# EAGLE board PKE Meter v8 (EAGLE 9.7.0)
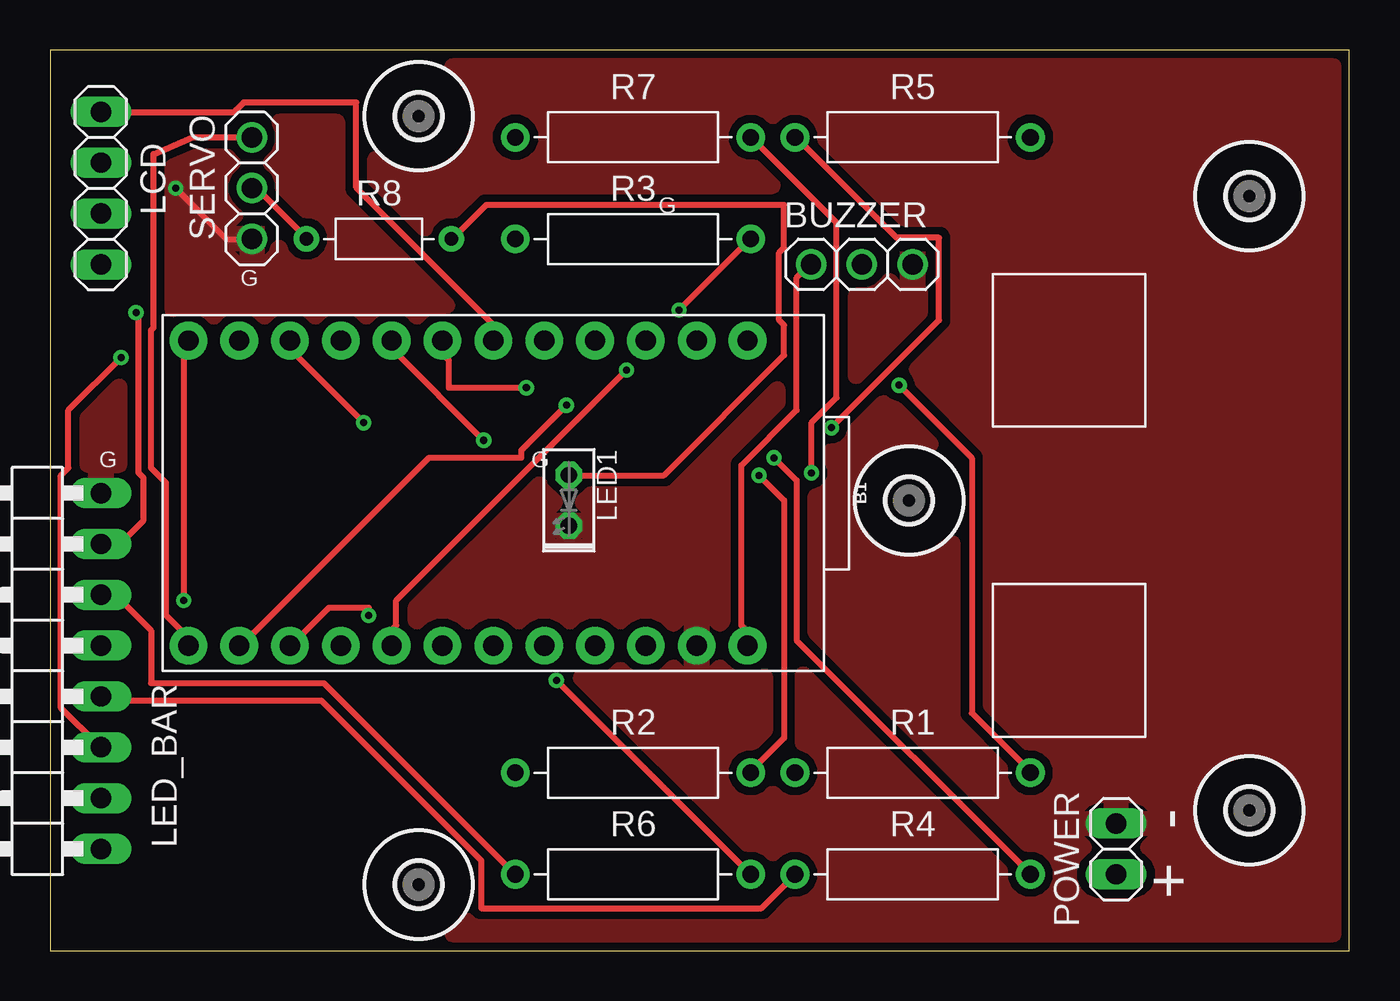
[diagram p0: board, top side]
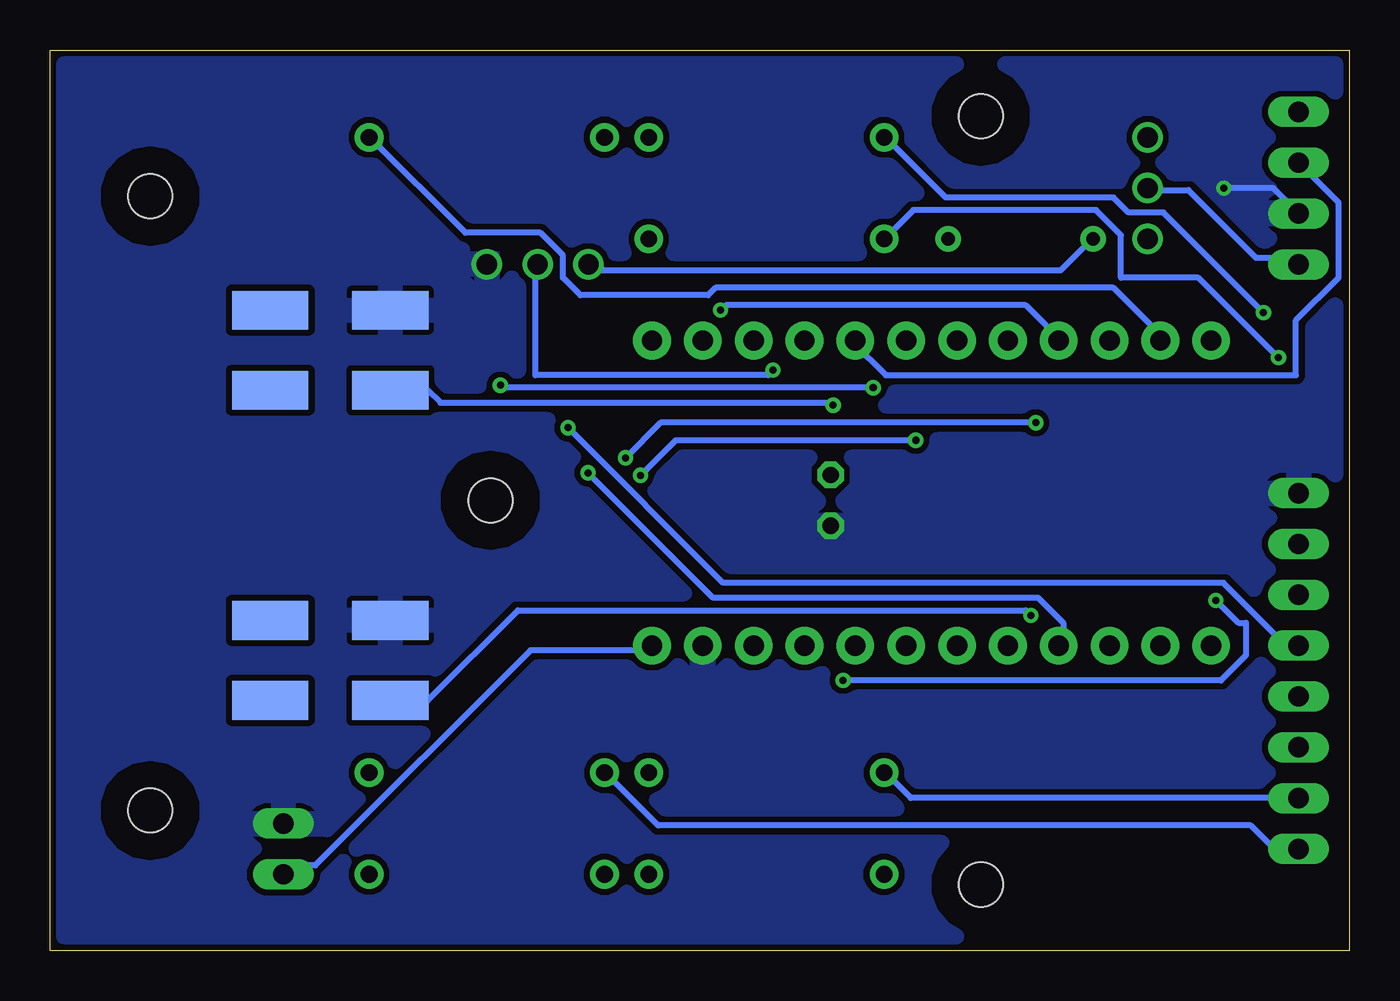
[diagram p1: board, bottom side, seen from below]

Size 64.92 x 45 mm. Coordinates in mm from the lower left corner, seen from the top.
Outline: 0,0 64.92,0 64.92,45 0,45 0,0
Copper layers (1*16): Top / Bottom
Stack-up Default Layer Stack: Top User Defined 0.035mm / Dielectric-1 User Defined 1.5mm / Bottom User Defined 0.035mm
Design rules "default *": minimum track width 12mil, minimum drill 0.35mm, track to track 12mil, track to pad 12mil, pad to pad 12mil, via to via 12mil, smd to smd 6mil, copper to edge 12mil, drill to drill 12mil, minimum pad ring 10mil, minimum via ring 8mil, stop-mask expansion 4mil, vias tented up to drill 0mil, thermal gap 10mil

## Footprints (pad centres in the part's own frame; a part is rotated, then mirrored left to right if it is on the bottom)
SPARKFUN_PRO_MICRO = drill 1.016 pad 1.88: 1 -7.62,12.7; 2 -7.62,10.16; 3 -7.62,7.62; 4 -7.62,5.08; 5 -7.62,2.54; 6 -7.62,0; 7 -7.62,-2.54; 8 -7.62,-5.08; 9 -7.62,-7.62; 10 -7.62,-10.16; 11 -7.62,-12.7; 12 -7.62,-15.24; 13 7.62,-15.24; 14 7.62,-12.7; 15 7.62,-10.16; 16 7.62,-7.62; 17 7.62,-5.08; 18 7.62,-2.54; 19 7.62,0; 20 7.62,2.54; 21 7.62,5.08; 22 7.62,7.62; 23 7.62,10.16; 24 7.62,12.7
1X03 = drill 1.016: 1 -2.54,0; 2 0,0; 3 2.54,0
2,2 = hole 2.2: 0,0
1X04 = drill 1.016 long: 1 -3.81,0; 2 -1.27,0; 3 1.27,0; 4 3.81,0
LED2X5 = drill 0.813 octagon: A -1.27,0; K 1.27,0
1X08/90 = drill 1.016 long: 1 -8.89,-3.81; 2 -6.35,-3.81; 3 -3.81,-3.81; 4 -1.27,-3.81; 5 1.27,-3.81; 6 3.81,-3.81; 7 6.35,-3.81; 8 8.89,-3.81
1X02 = drill 1.016 long: 1 -1.27,0; 2 1.27,0
RESAD1176W63L850D250B = drill 0.83 pad 1.43: 1 -5.88,0; 2 5.88,0
RESAD724W46L381D178B = drill 0.66 pad 1.26: 1 -3.62,0; 2 3.62,0
SWITCH = smd 3.81 x 1.93 bottom: D1 -3,2; D2 -3,-2; P$3 3,-2; P$6 3,2

## Placement (x,y rotation side)
B1  SPARKFUN_PRO_MICRO  [SPARKFUN_PRO_MICRO]  22.15,22.86 270 top
BUZZER  [1X03]  40.56,34.29 0 top
H1  MOUNT-HOLE2.2  [2,2]  18.42,41.7 0 top
H2  MOUNT-HOLE2.2  [2,2]  18.42,3.3 0 top
H3  MOUNT-HOLE2.2  [2,2]  59.92,37.7 0 top
H4  MOUNT-HOLE2.2  [2,2]  59.92,7 0 top
H5  MOUNT-HOLE2.2  [2,2]  42.92,22.5 0 top
LCD  [1X04]  2.54,38.1 90 top
LED1  [LED2X5]  25.92,22.5 270 top
LED_BAR  PINHD-1X8/90  [1X08/90]  -1.27,13.97 90 top
POWER  [1X02]  53.26,5.08 90 top
R1  220  [RESAD1176W63L850D250B]  43.1,8.89 0 top
R2  220  [RESAD1176W63L850D250B]  29.13,8.89 0 top
R3  220  [RESAD1176W63L850D250B]  29.13,35.56 0 top
R4  220  [RESAD1176W63L850D250B]  43.1,3.81 0 top
R5  220  [RESAD1176W63L850D250B]  43.1,40.64 0 top
R6  220  [RESAD1176W63L850D250B]  29.13,3.81 0 top
R7  220  [RESAD1176W63L850D250B]  29.13,40.64 0 top
R8  220  [RESAD724W46L381D178B]  16.43,35.56 0 top
SERVO  [1X03]  10.08,38.1 90 top
U$1  SWITCH  [SWITCH]  50.92,30 0 top
U$2  SWITCH  [SWITCH]  50.92,14.5 0 top

## Library data of the parts
B1 U$1 U$2 = Personal Library
BUZZER LED1 SERVO = adafruit
H1-H5 = holes
LCD POWER = pinhead
LED_BAR = Connector; CATEGORY: CONNECTOR; SUB-CATEGORY: PIN-HEADER
R1-R8 = Resistor; CATEGORY: Resistor; SUB-CATEGORY: Fixed

## Nets
BUZZER: B1.17 BUZZER.2
D1: B1.7 R1.2
D2: B1.8 R2.2
D3: B1.9 R3.2
D4: B1.10 R4.2
D5: B1.11 R5.2
D6: B1.12 R6.2
D7: B1.16 R7.2
GND: B1.23 BUZZER.3 LCD.2 LED1.K LED_BAR.8 POWER.2 SERVO.1 U$1.D1 U$2.D1
LED1: LED_BAR.1 R1.1
LED2: LED_BAR.2 R2.1
LED3: LED_BAR.3 R3.1
LED4: LED_BAR.4 R4.1
LED5: LED_BAR.5 R5.1
LED6: LED_BAR.6 R6.1
LED7: LED_BAR.7 R7.1
N$29: B1.19
N$30: B1.20
N$31: B1.4
N$34: B1.3
N$35: B1.22
N$36: B1.2
N$37: B1.1
N$38: B1.21
N$54: LED1.A R8.2
SDA: B1.5 LCD.3
SERVO: B1.13 SERVO.3
SLA: B1.6 LCD.4
SW1: B1.14 U$1.D2
SW2: B1.15 U$2.D2
VCC: B1.24 BUZZER.1 LCD.1 POWER.1 R8.1 SERVO.2

## Tracks (layer width: path | path; a pad name or v marks a point on that pad's centre or on a via)
BUZZER  (via drill 0.35)
  Top 0.305: v28.8,29 17.3,17.5 17.3,16.25 17.17,16.12 17.17,15.25 B1.17
  Bottom 0.305: v28.8,29 29.05,28.75 40.67,28.75 40.67,34.25 BUZZER.2
D1  (via drill 0.35)
  Top 0.305: v42.42,28.25 46.05,24.62 46.05,11.88 48.92,9 R1.2 | v23.8,28.12 19.92,28.12 19.92,29.5 19.67,29.75 19.67,30.38 B1.7
  Bottom 0.305: v42.42,28.25 42.3,28.12 v23.8,28.12
D2  (via drill 0.35)
  Top 0.305: v35.42,23.75 36.67,22.5 36.67,10.62 35.05,9 R2.2 | v21.67,25.5 17.17,30 17.17,30.38 B1.8
  Bottom 0.305: v35.42,23.75 33.67,25.5 v21.67,25.5
D3  (via drill 0.35)
  Top 0.305: v31.42,32 34.92,35.5 R3.2
  Bottom 0.305: v31.42,32 31.17,32.25 16.17,32.25 14.42,30.5 B1.9
D4  (via drill 0.35)
  Top 0.305: v36.17,24.62 37.3,23.5 37.3,15.5 48.92,3.88 R4.2 | v15.67,26.38 12.04,30 12.04,30.38 B1.10
  Bottom 0.305: v36.17,24.62 34.42,26.38 v15.67,26.38
D5
  Bottom 0.305: R5.2 48.92,40.62 44.17,35.88 40.42,35.88 39.3,34.75 39.3,33.62 38.42,32.75 32.05,32.75 31.67,33.12 11.79,33.12 9.54,30.88 9.54,30.5 B1.11
D6  (via drill 0.35)
  Top 0.305: v25.3,13.5 34.92,3.88 R6.2 | v6.67,17.5 6.67,30.25 6.79,30.38 B1.12
  Bottom 0.305: v25.3,13.5 6.42,13.5 5.17,14.75 5.17,16.38 5.54,16.38 v6.67,17.5
D7  (via drill 0.35)
  Top 0.305: v38.05,23.88 38.05,26.38 39.3,27.62 39.3,36.38 35.05,40.62 R7.2
  Bottom 0.305: v38.05,23.88 31.8,17.62 15.54,17.62 14.29,16.38 14.29,15.47 B1.16
GND  (via drill 0.35)
  Top 0.305: v6.27,38.1 8.81,35.56 SERVO.1
  Bottom 0.305: LCD.2 3.81,38.1 v6.27,38.1
  pour Top (isolate 0.406): 71.27,0 0,0 0,45 71.27,45
  pour Bottom (isolate 0.254): 64.92,0 0,0 0,45 64.92,45
LED1
  Bottom 0.305: R1.1 37.17,8.88 34.55,6.25 4.92,6.25 3.79,5.12 2.54,5.12 LED_BAR.1
LED2
  Bottom 0.305: R2.1 23.17,8.88 21.92,7.62 LED_BAR.2
LED3  (via drill 0.35)
  Top 0.305: v3.54,29.62 0.92,27 0.92,24.12 0.55,23.75 0.55,12.12 2.42,10.25 LED_BAR.3
  Bottom 0.305: v3.54,29.62 7.54,33.62 11.42,33.62 11.42,35.75 12.67,37 21.8,37 23.17,35.62 R3.1
LED4
  Top 0.305: R4.1 37.17,3.75 35.55,2.12 21.55,2.12 21.55,4.5 13.54,12.5 2.54,12.5 2.54,12.62 LED_BAR.4
LED5  (via drill 0.35)
  Top 0.305: v39.05,26.12 44.42,31.5 44.42,35.62 42.3,35.62 37.3,40.62 R5.1
  Bottom 0.305: v39.05,26.12 31.3,18.38 6.29,18.38 3.17,15.25 LED_BAR.5
LED6
  Top 0.305: R6.1 23.17,3.88 13.67,13.38 5.04,13.38 5.04,16 3.29,17.75 2.54,17.75 LED_BAR.6
LED7  (via drill 0.35)
  Top 0.305: v4.29,31.88 4.42,31.75 4.42,23.88 4.67,23.62 4.67,21.5 3.54,20.38 2.54,20.38 LED_BAR.7
  Bottom 0.305: v4.29,31.88 9.29,36.88 11.04,36.88 11.79,37.62 20.17,37.62 23.17,40.62 R7.1
N$54
  Top 0.305: R8.2 20.17,35.62 21.8,37.25 36.67,37.25 36.67,35.12 36.42,34.88 36.42,31.5 36.67,31.25 36.67,29.75 30.67,23.75 25.92,23.75 LED1.A
SDA
  Bottom 0.305: LCD.3 0.55,37.38 0.55,33.62 2.67,31.5 2.67,28.75 23.17,28.75 24.8,30.38 B1.5
SERVO
  Top 0.305: SERVO.3 7.12,40.64 5.17,39.81 5.17,31.12 5.04,31 5.04,24.12 5.79,23.38 5.79,16.75 6.79,15.75 6.79,15.25 B1.13
SLA
  Top 0.305: LCD.4 2.54,41.88 9.29,41.88 9.29,42 9.67,42.38 15.29,42.38 15.29,38.12 22.05,31.38 22.05,30.5 B1.6
SW1  (via drill 0.35)
  Top 0.305: v25.8,27.25 23.55,25 23.55,24.62 18.92,24.62 9.54,15.25 B1.14
  Bottom 0.305: v25.8,27.25 25.92,27.38 45.42,27.38 46.05,28 U$1.D2
SW2  (via drill 0.35)
  Top 0.305: v15.92,16.75 15.92,17.12 13.92,17.12 12.04,15.25 B1.15
  Bottom 0.305: v15.92,16.75 16.17,17 41.55,17 46.05,12.5 U$2.D2
VCC
  Top 0.305: R8.1 12.79,35.62 10.42,38 10.17,38 SERVO.2 | BUZZER.1 37.92,34.25 37.3,33.62 37.3,27 34.55,24.25 34.55,16.25 34.8,16 34.8,15.25 B1.24
  Bottom 0.305: LCD.1 2.54,34.38 2.79,34.62 4.67,34.62 8.04,38 10.04,38 SERVO.2 | POWER.1 53.17,3.88 52.8,4.25 51.67,4.25 40.92,15 35.05,15 34.92,15.12 B1.24 | R8.1 12.92,35.5 14.42,34 37.3,34 37.67,34.38 37.92,34.38 BUZZER.1

## Text on the board
tNames: G | G | G | G | + -